# Altium PCB EMG_shield.PcbDoc (part 3 of 3)
Units mm, origin at the board's own origin, x right, y up, seen from the top; angles counter-clockwise.
Board outline 20.05 x 63.8 mm, 6 copper layers (Top Layer, GND/PWR1, SIG1, SIG2, GND/PWR2, Bottom Layer), stack 0.957 mm thick; 130 components, 175 nets, 615 pads, 662 vias.
Unrouted connection lines stored in the file: 5.
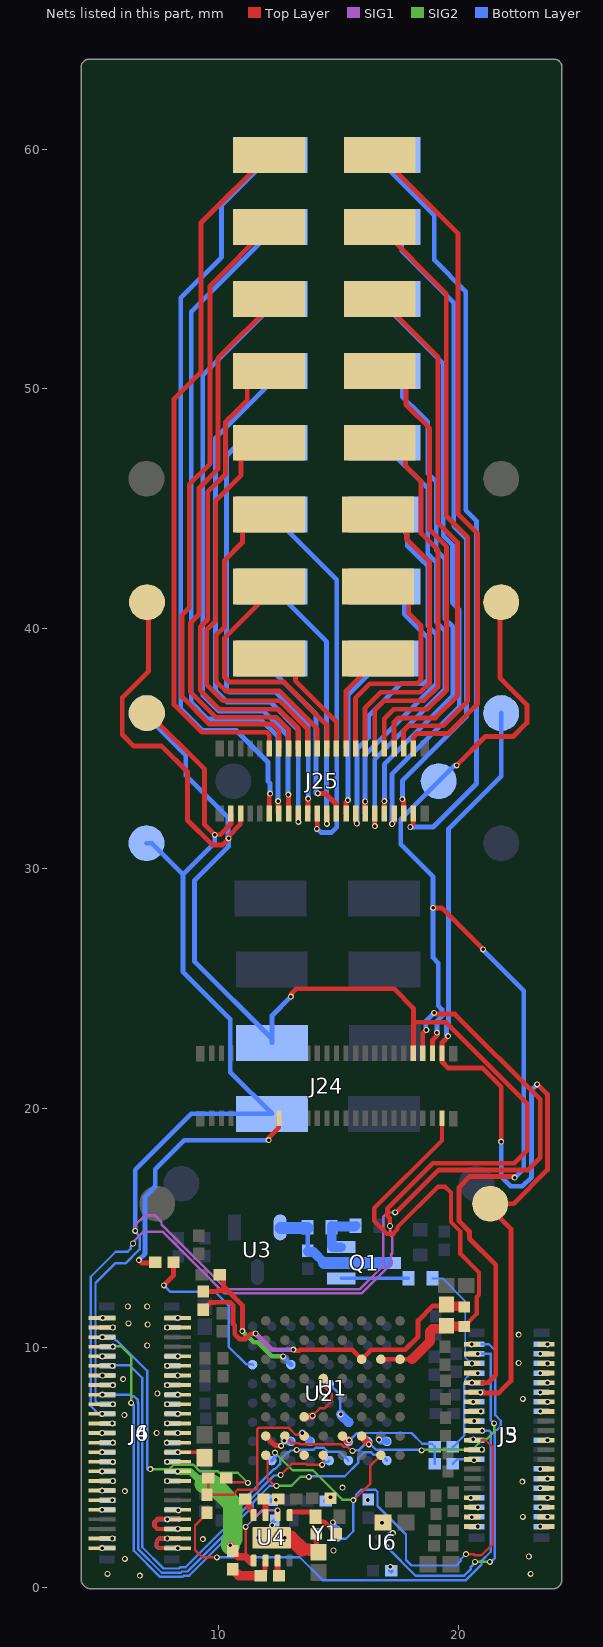
[diagram p7: the nets of this part, all layers, seen from the top]

## Via types
v1: diameter 0.25, hole 0.15, Top Layer to Bottom Layer, tented both sides, 585 vias
v2: diameter 0.25, hole 0.15, SIG2 to Bottom Layer, tented both sides, 41 vias
v3: diameter 0.25, hole 0.15, Top Layer to SIG1, tented both sides, 33 vias
v4: diameter 0.25, hole 0.15, Top Layer to Bottom Layer, 2 vias
v5: diameter 0.25, hole 0.15, Top Layer to GND/PWR1, tented both sides, 1 vias

## Nets (pads, with @x,y where several pads share a name; then routed paths per layer and width w, separated by ;. In a path a pad name is that pad's centre, name@x,y a point inside that pad or via, vN(x,y) a via of type N, cw(c..) or ccw(c..) an arc to the next point about the centre after c; other vN are vias at no path point) (continued)
GND: C1.2 C2.2 C15.2 C16.2 C30.2 C35.2 C36.2 C38.2 C39.2 C40.2 J3.15 J3.21 J3.27 J4.8 J4.18 J4.33 J4.43 J5.15 J5.21 J5.27 J6.8 J6.18 J6.33 J6.43 R3.2 R4.2 U1.C7 U1.D7 U1.E4 U1.F6 U1.H7 U2.C7 U2.D7 U2.E4 U2.F6 U2.H7 U4.2 U4.9 U6.B1 Y1.4 | length 13.3
  Top Layer w0.1: U1.F6@13.55,7.125 U1.F6@13.569,7.144 ; v3(13.9,7.17) 14.205,7.475 14.395,7.475 14.7,7.78 14.7,8.07 14.395,8.375 14.395,8.68 U1.E4@14.35,8.725
  Top Layer w0.2: C38.2@11.747,0.5 11.768,0.5 11.922,0.654 11.922,1.1 U4.2@11.947,1.125 ; U1.H7@11.95,6.325 12.347,5.928 12.581,5.928 v3(12.59,5.919) ; R3.2@14.061,2.25 14.061,1.581 14.061,1.568 C35.2@14.15,1.479 ; v1(16.8,2.7) 16.818,2.7 R4.2@16.843,2.725
  Top Layer w0.3: U1.F6@13.569,7.144 13.874,7.144 v3(13.9,7.17) ; U1.D7@15.15,6.325 15.177,6.325 15.352,6.15 v3(15.425,6.15) ; U1.C7@15.95,6.325 15.95,6.298 16.25,5.998 v3(16.25,5.975)
  Top Layer w0.4: C36.2@10.575,0.775 10.575,0.754 10.829,0.5 C38.2@11.747,0.5
  Top Layer w0.5: 13.475,1.6 13.778,1.6 13.797,1.581 14.061,1.581 14.071,1.581 14.15,1.502 C35.2@14.15,1.479
  Top Layer w0.6: v4(12.747,2.075) 13,2.075 13.475,1.6
  Bottom Layer w0.1: U2.E4@14.6,8.5 15.05,8.05 15.05,7.25 v2(15.075,7.225)
  Bottom Layer w0.2: C15.2@12.213,3.64 12.248,3.675 v1(12.375,3.675) ; v1(12.215,2.599) 12.215,2.613 12.225,2.623 12.225,2.7 C30.2@12.325,2.8 ; C16.2@14.446,3.615 14.467,3.615 14.617,3.765 14.64,3.765 v1(14.65,3.775) ; v2(14.75,2.725) 14.76,2.715 14.76,2.654 14.95,2.464 Y1.4@14.95,2.45 ; v1(16.197,3.658) 16.205,3.658 C40.2@16.225,3.679 ; U6.B1@17,2.1 17.007,2.1 17.172,2.265 17.239,2.265 v1(17.248,2.275) ; v1(17.145,0.87) 17.155,0.86 17.155,0.724 C39.2@17.179,0.7
  Bottom Layer w0.3: v2(12.725,6.125) 12.731,6.119 12.981,6.119 U2.C7@13,6.1 ; v2(13.475,6.45) 13.8,6.125 U2.D7@13.8,6.1 ; v2(16.675,6.175) 16.731,6.119 16.981,6.119 U2.H7@17,6.1
  Bottom Layer w0.4: v2(15.075,7.225) U2.F6@15.4,6.9
  other v1: 6.7,0.5 5.35,0.575 23,0.575 6.075,1.2 22.925,1.3 14.775,1.55 9.325,2.025 22.675,2.95 6.075,4.025 15.15,4.175 22.65,4.425 5.575,4.45 7.85,4.45 23.4,4.95 23.7,6.15 7.4,6.45 6.05,7.2 23.4,7.35 22.675,7.875 7.425,8.1 5.575,8.45 7.85,8.45 6,8.7 22.499,9.368 7,10.1 22.499,10.55 7.025,10.975 6.225,11.025 6.2,11.725 7,11.725
  other v4: 11.647,2.075
I2C_A_SCL: I2C_A_SCL.39 J4.36 J6.36 J24.22 J25.38 TP_I2C_A_SCL.45 TP_I2C_A_SCL_1.45 | length 80
  Top Layer w0.2: TP_I2C_A_SCL_1.45@7,41.1 7.061,41.039 7.061,38.217 5.969,37.125 5.969,35.583 6.452,35.1 7.612,35.1 8.687,34.025 8.687,32.013 9.725,30.975 10.15,30.975 10.4,31.225 v1(10.4,31.25) 10.4,31.347 10.885,31.832 10.885,32.275 J25.38@10.9,32.29 ; v1(13,24.65) 13.022,24.672 13.022,24.775 13.222,24.975 17.302,24.975 18.11,24.167 18.11,23.55 ; v3(17.131,15.084) 17.122,15.094 17.122,15.416 17.022,15.516 17.022,15.803 18.919,17.7 22.321,17.7 22.86,18.239 22.86,20.19 19.465,23.585 18.145,23.585 18.11,23.55 ; J24.22@18.1,22.29 18.1,22.633 18.11,22.643 18.11,23.55
  SIG1 w0.1: v1(6.415,14.355) 6.415,14.407 6.858,14.85 7.65,14.85 10.225,12.275 15.947,12.275 17.189,13.516 17.189,13.9 17.226,13.937 17.226,14.632 17.15,14.708 v3@17.15,15.15
  Bottom Layer w0.1: v1(5.125,7.25) 4.974,7.25 4.65,7.574 4.65,12.97 5.693,14.013 6.191,14.013 6.315,14.137 6.315,14.215 6.415,14.315 v1(6.415,14.355)
  Bottom Layer w0.2: TP_I2C_A_SCL.45@6.979,36.475 6.979,36.346 8.611,34.715 8.611,33.878 10.381,32.108 10.381,31.269 v1(10.4,31.25) 10.4,30.915 8.976,29.491 8.976,26.121 I2C_A_SCL.39@12.213,22.883 ; I2C_A_SCL.39@12.213,22.725 I2C_A_SCL.39@12.213,22.883 ; v1(13,24.65) 12.213,23.863 I2C_A_SCL.39@12.213,22.883
I2C_A_SDA: I2C_A_SDA.40 J4.35 J6.35 J24.23 J25.40 TP_I2C_A_SDA.46 TP_I2C_A_SDA_1.46 | length 73.7
  Top Layer w0.2: TP_I2C_A_SDA_1.46@7,36.475 7.05,36.475 9.4,34.125 9.4,31.823 v1(9.823,31.4) 10.045,31.4 10.5,31.855 J25.40@10.5,32.29 ; v3(17.347,15.65) 17.399,15.65 19.173,17.425 22.89,17.425 23.4,17.935 23.4,20.365 19.84,23.925 19.024,23.925 v1(18.974,23.975) ; J24.23@18.5,22.29 18.5,23.115 v1(18.645,23.26)
  SIG1 w0.1: v1(6.5,14.88) 6.5,15.116 6.909,15.525 7.329,15.525 7.6,15.254 7.6,15.15 10.3,12.45 15.875,12.45 16.85,13.425 16.85,15.476 17.022,15.648 17.346,15.648 v3(17.347,15.65)
  Bottom Layer w0.1: J6.35@5.32,7.675 4.959,7.675 4.85,7.784 4.85,12.714 5.662,13.526 6.099,13.526 6.69,14.116 6.69,14.671 6.5,14.861 v1(6.5,14.88)
  Bottom Layer w0.2: v1(6.5,14.88) 6.505,14.886 6.505,17.43 8.838,19.763 I2C_A_SDA.40@12.213,19.763 10.492,21.484 10.466,21.484 10.466,23.716 8.498,25.684 8.498,29.756 7.204,31.05 TP_I2C_A_SDA.46@6.979,31.05 ; 8.498,29.737 9.823,31.062 v1(9.823,31.4) ; v1(18.645,23.26) 18.645,23.275 18.62,23.275 18.62,23.558 18.588,23.59 v1(18.974,23.975)
  other v1: 5.575,7.65
I2C_B_SCL: J4.30 J6.30
  other v1: 5.14,9.65
I2C_B_SDA: J4.32 J6.32
  other v1: 5.14,8.85
MIC_CLK: J3.36 J5.36
  other v1: 20.8,3.35
MIC_DATA: J3.34 J5.34
  other v1: 20.5,3.75
MIC_THSEL: J3.38 J5.38
  other v1: 20.542,2.944
MIC_WAKE: J3.40 J5.40
  other v1: 20.8,2.55
MSP_CS: J4.12 J6.12
  other v1: 7.825,6.05
MSP_DR1: J4.13 J6.13
  other v1: 8.275,6.45
MSP_DR2: J4.21 J6.21
  other v1: 8.275,9.65
MSP_T\R\S\T\: J4.50 J6.50
  other v1: 5.125,1.65
MSP_TCK: J4.49 J6.49
  other v1: 5.55,2.05
MSP_TDI: J4.39 J6.39
  other v1: 5.575,6.05
MSP_TDO: J4.38 J6.38
  other v1: 5.125,6.45
MSP_TMS: J4.40 J6.40
  other v1: 5.125,5.65
MSP_VCC: J4.37 J6.37
  other v1: 5.55,6.85
NetC37_1: C37.1 U4.8 | length 0.8
  Top Layer w0.25: C37.1@11.097,3.7 11.118,3.7 11.229,3.589 11.229,3.367 11.447,3.15 U4.8@11.447,3.025
NetC37_2: C37.2 U4.7 | length 0.7
  Top Layer w0.25: C37.2@11.854,3.7 11.947,3.607 U4.7@11.947,3.025
NetC38_1: C38.1 U4.3 | length 0.6
  Top Layer w0.25: U4.3@12.447,1.125 12.447,0.557 C38.1@12.504,0.5
NetJ3_1: J3.1 J5.1
  other v1: 23.7,10.15
NetJ3_3: J3.3 J5.3
  other v1: 23.4,9.75
NetJ3_5: J3.5 J5.5
  other v1: 23.7,9.35
NetJ3_7: J3.7 J5.7
  other v1: 23.4,8.95
NetJ3_9: J3.9 J5.9
  other v1: 23.7,8.55
NetJ3_11: J3.11 J5.11
  other v1: 23.4,8.15
NetJ3_13: J3.13 J5.13
  other v1: 23.7,7.75
NetJ3_16: J3.16 J5.16 | length 0.5
  Top Layer w0.15: J3.16@20.56,7.35 v1(20.925,7.35)
  Bottom Layer w0.15: J5.16@20.745,7.35 v1(20.925,7.35)
NetJ3_18: J3.18 J5.18
  other v1: 20.65,6.95
NetJ3_29: J3.29 J5.29
  other v1: 23.7,4.55
NetJ3_31: J3.31 J5.31
  other v1: 23.4,4.15
NetJ3_33: J3.33 J5.33
  other v1: 23.7,3.75
NetJ3_35: J3.35 J5.35
  other v1: 23.4,3.35
NetJ3_37: J3.37 J5.37
  other v1: 23.7,2.95
NetJ3_39: J3.39 J5.39
  other v1: 23.4,2.55
NetJ24_43: J24.43 R10.1 | length 11.3
  Top Layer w0.2: v1(6.655,13.662) 6.781,13.536 7.235,13.536 7.235,13.633 7.343,13.633 R10.1@7.343,13.566 ; v1(12.072,18.661) 12.072,18.772 12.49,19.19 J24.43@12.49,19.6
  Bottom Layer w0.2: v1(6.655,13.662) 6.655,13.675 6.915,13.935 6.915,16.306 7.341,16.731 7.341,17.45 8.551,18.661 v1(12.072,18.661)
NetJ25_1: J25.1 J_A1P.1 | length 28.3
  Top Layer w0.2: J_A1P.1@16.705,59.75 19.964,56.49 19.964,44.783 20.78,43.968 20.78,36.853 19.553,35.625 18.252,35.625 18.1,35.473 J25.1@18.1,35
NetJ25_2: J25.2 J_B1P.21 | length 31.9
  Top Layer w0.2: v1(17.983,31.725) 18.1,31.842 J25.2@18.1,32.29
  Bottom Layer w0.2: J_B1P.21@16.9,59.75 16.9,59.32 18.974,57.246 18.974,55.377 20.295,54.056 20.295,44.933 20.745,44.483 20.745,33.54 18.93,31.725 v1(17.983,31.725)
NetJ25_3: J25.3 J_A1N.2 | length 25.2
  Top Layer w0.2: J_A1N.2@16.705,56.75 19.482,53.973 19.482,44.695 20.377,43.8 20.377,36.967 19.36,35.95 17.9,35.95 17.7,35.75 J25.3@17.7,35
NetJ25_4: J25.4 J_B1N.22 | length 27.3
  Top Layer w0.2: v1(17.65,32.884) 17.7,32.834 J25.4@17.7,32.29
  Bottom Layer w0.2: J_B1N.22@16.9,56.75 17.328,56.75 17.625,56.453 17.625,55.75 ; 17.627,55.752 19.787,53.593 19.787,44.275 20.32,43.742 20.32,36.325 17.65,33.655 v1(17.65,32.884)
NetJ25_5: J25.5 J_A2P.3 | length 22.1
  Top Layer w0.2: J_A2P.3@16.705,53.75 19.138,51.316 19.138,44.4 19.95,43.588 19.95,37.201 19.025,36.275 17.475,36.275 17.3,36.1 J25.5@17.3,35
NetJ25_6: J25.6 J_B2P.23 | length 25.5
  Top Layer w0.2: v1(17.221,31.85) 17.3,31.929 J25.6@17.3,32.29
  Bottom Layer w0.2: J_B2P.23@16.35,53.375 16.725,53.75 J_B2P.23@16.9,53.75 16.9,53.501 19.355,51.047 19.355,43.875 19.736,43.494 19.736,41.075 20.02,40.791 20.02,36.745 17.221,33.946 17.221,32.938 17.225,32.935 17.225,32.665 17.221,32.662 v1(17.221,31.85)
NetJ25_7: J25.7 J_A2N.4 | length 19.1
  Top Layer w0.2: J_A2N.4@16.705,50.75 17.1,50.75 17.8,50.05 17.8,49.334 18.784,48.35 18.784,44.117 19.492,43.409 19.492,37.434 18.692,36.634 17.282,36.634 16.891,36.243 J25.7@16.891,34.96
NetJ25_8: J25.8 J_B2N.24 | length 21
  Top Layer w0.1: v1@16.891,32.746 16.888,32.75 16.888,32.788 v1(16.9,32.8)
  Top Layer w0.2: J25.8@16.891,32.25 v1@16.891,32.746
  Bottom Layer w0.2: v1(16.9,32.8) 16.9,34.345 19.745,37.189 19.745,40.087 19.412,40.42 19.412,42.919 19.058,43.273 19.058,46.118 18.704,46.472 18.704,48.626 18.034,49.296 18.02,49.296 17.65,49.666 17.65,50.225 17.125,50.75 J_B2N.24@16.9,50.75
NetJ25_9: J25.9 J_A3P.5 | length 16
  Top Layer w0.2: J25.9@16.5,35 16.5,36.6 16.888,36.988 17.667,36.988 18.546,36.988 19.138,37.581 19.138,38.459 19.138,38.64 19.138,43.262 18.43,43.97 18.43,46.14 17.775,46.795 17.775,47.05 17.075,47.75 J_A3P.5@16.705,47.75
NetJ25_10: J25.10 J_B3P.25 | length 18.7
  Top Layer w0.2: v1(16.5,31.762) J25.10@16.5,32.209
  Bottom Layer w0.2: v1(16.5,31.762) 16.5,34.55 19.412,37.462 19.412,39.919 19.058,40.273 19.058,42.773 18.704,43.127 18.704,45.846 16.9,47.65 J_B3P.25@16.9,47.75
NetJ25_11: J25.11 J_A3N.6 | length 13.1
  Top Layer w0.2: J25.11@16.091,34.96 16.091,36.692 16.741,37.342 17.52,37.342 18.399,37.342 18.784,37.727 18.784,38.606 18.784,38.786 18.784,42.774 17.816,43.742 17.816,44.05 17.116,44.75 J_A3N.6@16.626,44.75
NetJ25_12: J25.12 J_B3N.26 | length 14.7
  Top Layer w0.1: v1@16.092,32.725 v1(16.092,32.788)
  Top Layer w0.2: J25.12@16.091,32.25 v1@16.091,32.725
  Bottom Layer w0.2: v1(16.092,32.788) 16.092,34.734 19.058,37.701 19.058,39.773 18.704,40.127 18.704,42.596 18.704,42.626 18.526,42.804 18.496,42.804 17.85,43.45 17.85,43.925 17.025,44.75 J_B3N.26@16.9,44.75
NetJ25_13: J25.13 J_A4P.7 | length 10.2
  Top Layer w0.2: J25.13@15.691,34.96 15.691,37.096 16.291,37.696 17.374,37.696 18.252,37.696 18.43,37.874 18.43,38.753 18.43,38.933 18.43,39.007 18.43,40.12 17.916,40.634 17.916,41.05 17.366,41.6 16.776,41.6 J_A4P.7@16.626,41.75
NetJ25_14: J25.14 J_B4P.27 | length 13.2
  Top Layer w0.2: J25.14@15.691,32.25 15.715,32.226 15.715,31.918 15.75,31.883 v1(15.75,31.869)
  Bottom Layer w0.2: v1(15.75,31.869) 15.75,34.976 16.23,35.456 16.23,36.346 17.58,37.696 18.526,37.696 18.704,37.874 18.704,39.626 17.727,40.603 17.727,41.673 17.65,41.75 J_B4P.27@16.9,41.75
NetJ25_15: J25.15 J_A4N.8 | length 4.3
  Top Layer w0.2: J25.15@15.3,35 15.3,37.4 16.626,38.726 J_A4N.8@16.626,38.75
NetJ25_16: J25.16 J_B4N.28 | length 7.2
  Top Layer w0.2: J25.16@15.291,32.25 15.291,32.765 v1(15.375,32.849)
  Bottom Layer w0.2: v1(15.375,32.849) 15.375,37.225 J_B4N.28@16.9,38.75
NetJ25_17: J25.17 J_A5P.9 | length 5.3
  Top Layer w0.2: J_A5P.9@12.08,38.75 12.7,38.75 13.185,38.265 13.185,37.825 14.891,36.119 J25.17@14.891,34.96
NetJ25_18: J25.18 J_B5P.29 | length 7.8
  Top Layer w0.2: v1(14.122,33.125) 14.439,33.125 14.9,32.664 J25.18@14.9,32.29
  Bottom Layer w0.2: J_B5P.29@12.2,38.75 12.2,38.264 14.046,36.418 14.046,33.125 v1(14.122,33.125)
NetJ25_19: J25.19 J_A5N.10 | length 10.6
  Top Layer w0.2: J_A5N.10@12.08,41.75 12.08,41.455 10.235,39.61 10.235,37.965 10.425,37.775 12.702,37.775 14.5,35.977 J25.19@14.5,35
NetJ25_20: J25.20 J_B5N.30 | length 11.2
  Top Layer w0.2: v1@14.499,31.859 14.499,32.228 J25.20@14.506,32.235
  Bottom Layer w0.2: J_B5N.30@12.2,41.75 14.478,39.472 14.478,31.878 v1(14.498,31.858)
NetJ25_21: J25.21 J_A6P.11 | length 14
  Top Layer w0.2: J_A6P.11@12.08,44.75 11.675,44.75 10.975,44.05 10.975,43.59 10.235,42.85 10.235,40.086 9.886,39.736 9.886,37.788 10.274,37.4 12.512,37.4 14.091,35.821 J25.21@14.091,34.96
NetJ25_22: J25.22 J_B6P.31 | length 15.8
  Top Layer w0.2: v1(14.077,31.65) 14.1,31.673 J25.22@14.1,32.29
  Bottom Layer w0.2: J_B6P.31@12.2,44.75 14.91,42.04 14.91,31.71 14.7,31.5 14.24,31.5 14.09,31.65 v1(14.077,31.65)
NetJ25_23: J25.23 J_A6N.12 | length 17.7
  Top Layer w0.2: J_A6N.12@12.08,47.75 10.922,47.75 10.922,46.397 9.864,45.339 9.864,40.327 9.489,39.952 9.489,37.66 10.161,36.988 10.531,36.988 12.536,36.988 13.691,35.832 J25.23@13.691,34.96
NetJ25_24: J25.24 J_B6N.32 | length 19.6
  Top Layer w0.2: J25.24@13.715,32.274 13.712,32.277 13.712,32.902 v1(13.721,32.911)
  Bottom Layer w0.2: J_B6N.32@12.2,47.75 10.85,47.75 10.312,47.212 10.312,37.457 10.427,37.342 12.377,37.342 13.721,35.998 v1(13.721,32.911)
NetJ25_25: J25.25 J_A7P.13 | length 20.3
  Top Layer w0.2: J_A7P.13@12.08,50.75 11.876,50.75 11.176,50.05 11.176,49.516 10.464,48.804 10.454,48.804 10.276,48.626 10.276,46.447 9.527,45.698 9.527,40.379 9.214,40.066 9.214,37.434 10.012,36.636 12.499,36.636 13.3,35.835 13.3,34.969 J25.25@13.291,34.96
NetJ25_26: J25.26 J_B7P.33 | length 22.6
  Top Layer w0.2: J25.26@13.3,32.29 13.305,32.285 13.305,31.942 v1(13.31,31.937)
  Bottom Layer w0.2: J_B7P.33@12.2,50.75 12.2,50.288 9.85,47.938 9.85,37.419 10.328,36.941 12.134,36.941 13.31,35.765 v1(13.31,31.937)
NetJ25_27: J25.27 J_A7N.14 | length 23.4
  Top Layer w0.2: J_A7N.14@12.08,53.75 12.256,53.574 9.957,51.274 9.957,46.65 9.169,45.863 9.169,40.608 8.814,40.253 8.814,37.35 9.864,36.3 12.39,36.3 12.9,35.79 J25.27@12.9,35
NetJ25_28: J25.28 J_B7N.34 | length 25.2
  Top Layer w0.2: v1(12.891,33.075) 12.9,33.066 J25.28@12.9,32.29
  Bottom Layer w0.2: J_B7N.34@12.2,53.75 12.2,53.448 9.322,50.57 9.322,37.215 9.987,36.55 11.866,36.55 12.878,35.538 v1@12.878,33.089
NetJ25_29: J25.29 J_A8P.15 | length 26.5
  Top Layer w0.2: J_A8P.15@12.08,56.75 9.627,54.297 9.627,46.875 8.763,46.011 8.763,40.874 8.458,40.569 8.458,37.15 9.583,36.025 12.226,36.025 12.5,35.751 J25.29@12.5,35
NetJ25_30: J25.30 J_B8P.35 | length 28.7
  Top Layer w0.2: v1(12.465,32.8) 12.465,32.325 J25.30@12.5,32.29
  Bottom Layer w0.2: J_B8P.35@12.2,56.75 12.2,56.573 8.839,53.213 8.839,36.925 9.539,36.225 11.727,36.225 12.465,35.487 v1(12.465,32.8)
NetJ25_31: J25.31 J_A8N.16 | length 29.6
  Top Layer w0.2: J_A8N.16@12.075,59.745 J_A8N.16@12.08,59.75 9.246,56.916 9.246,50.7 8.128,49.582 8.128,36.824 9.277,35.675 11.983,35.675 12.1,35.558 J25.31@12.1,35
NetJ25_32: J25.32 J_B8N.36 | length 31.4
  Top Layer w0.2: J25.32@12.1,32.29 12.1,33.071 12.131,33.102 v1(12.131,33.115)
  Bottom Layer w0.2: v1(12.131,33.115) 12.131,33.549 12.04,33.64 12.04,34.435 10.725,35.75 9.304,35.75 8.407,36.647 8.407,53.793 10.109,55.495 10.109,57.659 J_B8N.36@12.2,59.75
NetQ1_1: Q1.1 R5.2 | length 2.8
  Bottom Layer w0.15: Q1.1@15.1,12.9 R5.2@17.9,12.9
NetQ1_2: Q1.2 R6.1 R7.2 | length 2.3
  Bottom Layer w0.4: Q1.2@15.1,14.2 14.75,14.2 14.7,14.25 14.7,15.1 14.737,15.062 15.663,15.062 R6.1@15.7,15.1
NetR2_1: R2.1 R3.1 U4.5 | length 2.5
  Top Layer w0.2: U4.5@12.947,3.025 12.947,3.137 12.972,3.162 13.754,3.162 13.767,3.15 13.872,3.15 14.022,3 14.022,2.9 14.172,2.75 14.382,2.75 14.882,2.25 R3.1@14.889,2.25
NetR10_2: R10.2 U2.A3 | length 7.2
  Top Layer w0.2: v1(7.701,12.607) 8.101,13.008 R10.2@8.101,13.566
  Bottom Layer w0.1: v1(7.701,12.607) 7.959,12.35 9.825,12.35 10.4,11.775 10.4,10.05 11.128,9.322 11.378,9.322 U2.A3@11.4,9.3
NetR11_2: R11.2 R35.1 U1.F7 | length 7.5
  Top Layer w0.1: R35.1@9.5,3.879 9.546,3.925 R11.2@9.546,4.575 ; R35.1@9.546,3.879 10.63,3.879 10.689,3.937 10.689,3.998 10.777,4.086 11.541,4.086 11.6,4.145 11.6,6.616 11.659,6.675 12.895,6.675 13.2,6.37 13.505,6.37 U1.F7@13.55,6.325
NetR12_2: R12.2 R36.1 U2.F7 | length 4.7
  Bottom Layer w0.1: U2.F7@15.4,6.1 15.75,6.45 18.025,6.45 18.475,6 18.871,6 R12.2@18.996,5.875 R36.1@18.996,5.175
not_used: J3.24 J5.24 | length 0.6
  Top Layer w0.1: J3.24@20.56,5.75 20.566,5.756 20.957,5.756 v1(20.963,5.762)
  Bottom Layer w0.1: J5.24@20.745,5.75 20.757,5.762 v1(20.963,5.762)
nRF_P0.04: J3.20 J5.20 R35.2 | length 21.2
  Top Layer w0.1: R35.2@9.5,3.121 9.5,3.1 9,2.6 9,1.575 9.309,1.266 v1(9.909,1.266) ; J3.20@20.56,6.55 v1(20.975,6.55)
  Bottom Layer w0.1: v1(9.909,1.266) 13.368,1.266 14.32,0.314 20.303,0.314 20.95,0.961 20.95,1.114 21.333,1.497 21.333,6.491 21.274,6.55 v1(20.975,6.55) J5.20@20.745,6.55
nRF_P0.05: J3.22 J5.22 U1.B8 U2.B8 Y1.1 | length 22.7
  Top Layer w0.1: v1@15.6,3.625 16.3,4.325 16.3,5.075 U1.B8@16.75,5.525 ; v1(20.3,1.4) 20.62,1.4 20.67,1.35 20.95,1.35 21.425,1.825 21.425,5.85 21.125,6.15 20.642,6.15 v1(20.608,6.184)
  SIG2 w0.1: v2(12.336,5.629) 13.065,4.9 13.914,4.9 15.139,3.675 15.575,3.675 v1(15.6,3.65)
  Bottom Layer w0.1: Y1.1@14.95,2.04 15.29,2.04 15.6,2.35 15.6,3.684 15.725,3.809 15.725,3.885 15.927,4.086 16.523,4.086 16.611,3.998 16.611,3.402 17.8,2.213 17.8,1.147 18.022,0.925 19.9,0.925 20.086,1.111 20.086,1.186 v1(20.3,1.4)
  Bottom Layer w0.15: U2.B8@12.2,5.3 12.336,5.436 v2(12.336,5.629)
nRF_P0.07/AMUX: J3.26 J5.26 R36.2 | length 1.1
  Bottom Layer w0.1: R36.2@19.754,5.175 19.929,5.35 J5.26@20.745,5.35
  other v1: 20.635,5.318
nRF_P0.12_GAP_GPIO64: J3.12 J5.12 J24.25 TP_GPIO64.48 TP_GPIO64_1.48 | length 43.7
  Top Layer w0.2: v1(19.555,23) 19.555,22.991 19.3,22.736 J24.25@19.3,22.29 19.3,21.932 19.561,21.671 20.991,21.671 21.082,21.579 21.082,21.576 21.768,20.89 v1(21.768,18.606) ; J3.12@20.56,8.15 v1(20.9,8.15) 20.925,8.125 21.675,8.125 22.174,8.624 22.174,14.967 TP_GPIO64_1.48@21.54,15.601 ; TP_GPIO64_1.48@21.311,16.013 22.287,16.013 23.698,17.424 23.698,20.575 23.323,20.95 23.308,20.95 v1(23.266,20.991)
  Bottom Layer w0.2: v1(19.555,23) 19.525,23 19.484,23.041 19.484,23.449 19.566,23.531 19.566,23.719 19.574,23.726 19.574,24.224 19.566,24.231 19.566,31.636 21.768,33.837 TP_GPIO64.48@21.768,36.475 ; v1(21.768,18.606) 21.768,17.13 22.159,16.738 22.651,16.738 23.038,17.125 23.038,20.763 v1(23.266,20.991)
nRF_P0.31: J3.2 J5.2 U6.B2 | length 15.2
  SIG2 w0.1: v2(20.675,1.075) v2(21.3,1.075)
  Bottom Layer w0.1: U6.B2@17,1.7 18.2,0.5 20.225,0.5 20.508,0.783 20.508,0.867 20.675,1.034 v2(20.675,1.075) ; J5.2@20.745,10.15 21.259,10.15 21.525,9.884 21.525,7.189 21.75,6.964 21.75,6.736 21.589,6.575 21.508,6.575 21.508,1.242 21.341,1.075 v2(21.3,1.075)
  other v1: 20.54,10.15
nRF_P1.00_GAP_GPIO60: J3.4 J5.4 U1.G7 U2.G7 | length 13.5
  Top Layer w0.1: U1.G7@12.75,6.325 13.049,6.026 13.354,6.026 13.405,5.975 14.55,5.975 15.111,5.975 15.218,5.868 15.367,5.868 15.526,5.709 v1(15.567,5.709)
  SIG2 w0.1: v2(18.45,5.725) 18.475,5.75 20.562,5.75 21.012,6.2 21.175,6.2 21.475,6.5 v2(21.475,6.85)
  Bottom Layer w0.1: v1(15.567,5.709) 15.596,5.738 15.838,5.738 U2.G7@16.2,6.1 16.55,5.75 18.425,5.75 v2(18.45,5.725) ; v1(20.8,9.75) 21.341,9.75 21.341,6.984 v2(21.475,6.85)
nRF_P1.01_GAP_GPIO61: J3.6 J5.6 R5.1 | length 4.5
  Bottom Layer w0.075: R5.1@18.9,12.9 19.325,12.9 20.274,11.951 20.274,9.582 20.396,9.46 20.42,9.46 20.53,9.35 v1(20.551,9.35)
nRF_P1.09_GAP_GPIO62: J3.8 J5.8 R12.1 | length 3.7
  Bottom Layer w0.075: 20.225,8.521 20.277,8.574 20.277,8.722 20.358,8.803 20.382,8.803 20.53,8.95 v1(20.785,8.95)
  Bottom Layer w0.1: R12.1@19.754,5.875 19.775,5.875 19.961,6.061 19.961,6.083 20.232,6.353 20.232,8.338 20.225,8.345 20.225,8.521
nRF_P1.11_GAP_GPIO63: J3.10 J5.10 J24.24 TP_GPIO63.47 TP_GPIO63_1.47 | length 48.5
  Top Layer w0.2: J24.24@18.9,22.29 18.91,22.3 18.91,22.849 19.121,23.06 19.121,23.115 v1(19.086,23.15) ; v1(18.93,28.35) 19.293,28.35 v1(21.018,26.625) ; v1(19.914,34.3) 21.114,35.5 22.276,35.5 22.841,36.066 22.841,36.821 21.717,37.946 TP_GPIO63_1.47@21.717,41.225 ; v1(20.55,8.55) J3.10@20.56,8.55 21.219,8.55 21.539,8.87 21.539,13.469 20.447,14.562 20.447,14.852 20.011,15.288 20.011,16.695 20.466,17.15 22.277,17.15 v1(22.327,17.1)
  Bottom Layer w0.2: v1(19.086,23.15) 19.086,23.628 19.299,23.84 19.299,24.11 19.148,24.261 19.148,26.052 18.931,26.269 18.931,29.646 17.577,31 17.577,32.051 TP_GPIO63.47@19.164,33.638 19.826,34.3 v1(19.914,34.3) ; v1(21.018,26.625) 21.018,26.588 22.708,24.899 22.708,17.481 v1(22.327,17.1)
nRF_QSPI_CLK: J4.20 J6.20
  other v1: 7.85,9.25
nRF_QSPI_CS_CONN: J4.14 J6.14
  other v1: 7.85,6.85
nRF_QSPI_IO0: J4.19 J6.19
  other v1: 8.275,8.85
nRF_QSPI_IO1: J4.17 J6.17
  other v1: 8.275,8.05
nRF_QSPI_IO2: J4.16 J6.16
  other v1: 7.85,7.65
nRF_QSPI_IO3: J4.15 J6.15
  other v1: 8.275,7.25
R\S\T\: J4.5 J6.5
  other v1: 8.305,3.222
REF_2.0V: C33.1 Q1.3 R7.1 U3.2 | length 5.7
  Bottom Layer w0.2: C33.1@13.7,14.057 R7.1@13.7,15.1
  Bottom Layer w0.4: C33.1@13.7,14.036 13.736,13.999 13.94,13.999 14.389,13.55
  Bottom Layer w0.5: U3.2@12.568,15 R7.1@13.7,15 ; 14.389,13.55 Q1.3@17,13.55
RLDINV: C21.1 R1.1 R33.2 U1.C3 | length 14.3
  Top Layer w0.2: R33.2@9.35,11.593 9.35,11.614 9.628,11.892 9.81,11.892 9.823,11.905 10.461,11.905 10.578,11.788 10.578,11.016 10.653,10.941 10.653,10.565 10.843,10.375 11.113,10.375 11.328,10.59 11.515,10.59 v3(11.525,10.6) ; v3(13.1,9.925) 13.114,9.925 13.155,9.883 13.343,9.883 13.384,9.925 15.55,9.925 U1.C3@15.95,9.525 16.35,9.925 17.758,9.925 18.303,10.47 18.303,11.139 18.914,11.75 19.437,11.75 C21.1@19.492,11.805
  Top Layer w0.4: C21.1@19.492,11.805 19.561,11.736 20.192,11.736 R1.1@20.225,11.704
  SIG1 w0.2: v3(11.525,10.6) 12.2,9.925 v3(13.1,9.925)
RLDINV_ADS: R33.1 R34.2 U2.C3 | length 6.4
  Top Layer w0.2: R33.1@9.35,12.35 9.901,12.35 9.946,12.395 10.36,12.395 ; R34.2@10.032,13.05 10.054,13.05 10.19,12.914 10.19,12.565 10.36,12.395 ; v1(10.978,10.7) 10.978,11.777 10.36,12.395
  SIG2 w0.2: v1(10.978,10.7) 11.442,10.236 11.614,10.236 12.2,9.65 v2(12.675,9.65)
  Bottom Layer w0.2: v2(12.675,9.65) 12.675,9.638 13,9.313 U2.C3@13,9.3
RLDOUT: C21.2 J24.26 R1.2 U1.A3 U1.B3 | length 20.6
  Top Layer w0.18: J24.26@19.3,19.686 19.3,18.654 16.476,15.83 16.476,15.294 17.006,14.764 17.282,14.764 17.282,14.789 17.446,14.954 17.446,15.039 19.133,16.725 19.432,16.725 19.675,16.482 19.675,15.249 20.066,14.858 20.066,13.925 20.846,13.145 20.846,12.215 20.745,12.115 20.745,11.413 20.229,10.896 R1.2@20.225,10.896
  Top Layer w0.2: U1.B3@16.75,9.525 U1.A3@17.55,9.525 18.05,9.525
  Top Layer w0.4: 18.05,9.525 18.8,10.275 18.8,10.691 18.904,10.795 19.382,10.795 19.492,10.905 C21.2@19.492,10.925 19.506,10.911 20.211,10.911 R1.2@20.225,10.896
SPI_A_CLK: J4.31 J6.31 U1.F8 U2.F8 | length 20.7
  Top Layer w0.1: v1(13.242,5.751) 13.283,5.751 13.508,5.525 U1.F8@13.55,5.525
  Bottom Layer w0.1: v1(5.55,9.25) 5.575,9.275 6.273,9.275 6.8,8.748 6.8,1.688 7.688,0.8 8.33,0.8 8.38,0.85 8.61,0.85 10.152,2.392 10.398,2.392 10.486,2.48 10.486,2.956 11.05,3.52 11.05,3.7 12.3,4.95 12.345,4.95 12.55,5.155 12.55,5.345 12.855,5.65 12.917,5.65 12.989,5.722 13.213,5.722 v1(13.242,5.751) 13.945,5.75 14.028,5.833 14.372,5.833 14.53,5.675 15.025,5.675 U2.F8@15.4,5.3
SPI_A_CS: J4.28 J6.28 R11.1 | length 11.9
  Top Layer w0.1: R11.1@10.304,4.575 10.49,4.389 11.187,4.389 v1(11.201,4.375)
  SIG2 w0.1: v2(7.135,4.947) 7.936,4.947 8.114,5.125 8.931,5.125 9.206,4.85 9.942,4.85 10.001,4.792 10.784,4.792 v1(11.201,4.375)
  Bottom Layer w0.1: J6.28@5.345,10.45 5.565,10.45 5.705,10.31 5.737,10.31 7,9.047 7,4.95 7.025,4.925 7.047,4.947 v2(7.135,4.947)
  other v1: 5.14,10.45
SPI_A_MISO: J4.34 J6.34 U1.E8 U2.E8 | length 18.7
  Top Layer w0.1: v1(12.575,4.7) 13.043,5.168 13.63,5.168 13.673,5.125 v1(14.3,5.125) ; v1@14.293,5.107 14.325,5.14 14.325,5.5 U1.E8@14.35,5.525
  Bottom Layer w0.1: J6.34@5.345,8.05 6.275,8.05 6.339,7.986 6.454,7.986 6.615,7.825 6.615,7.71 6.625,7.7 6.625,1.615 7.615,0.625 8.403,0.625 8.453,0.675 8.682,0.675 10.224,2.217 10.471,2.217 10.661,2.408 10.661,2.884 11.225,3.447 11.225,3.605 12.3,4.68 12.555,4.68 v1(12.575,4.7) ; v1(14.3,5.125) 14.341,5.125 14.412,5.197 14.416,5.197 14.461,5.243 14.543,5.243 U2.E8@14.6,5.3
  other v1: 5.14,8.05
SPI_A_MOSI: J4.29 J6.29 U1.H8 U2.H8 | length 24.4
  Top Layer w0.1: U1.H8@11.95,5.525 12.007,5.468 12.007,5.334 12.025,5.316 12.025,4.55 12.268,4.307 12.302,4.307 12.359,4.25 v1(12.4,4.25)
  SIG2 w0.1: v1(5.575,10.05) 5.6,10.075 5.9,10.075 6.34,9.635 v2(6.34,7.711) ; v1(12.4,4.25) 13.025,4.25 13.4,4.625 v2(13.75,4.625)
  Bottom Layer w0.1: v2(6.34,7.711) 6.45,7.602 6.45,1.543 7.543,0.45 8.475,0.45 8.525,0.5 8.755,0.5 10.297,2.042 10.543,2.042 10.836,2.335 10.836,2.811 11.4,3.375 11.4,3.533 12.117,4.25 v1(12.4,4.25) ; v2(13.75,4.625) 13.775,4.65 15.245,4.65 15.8,5.205 15.8,5.395 16.055,5.65 16.345,5.65 16.445,5.55 16.75,5.55 U2.H8@17,5.3
SPI_B_CLK: J4.27 J6.27 | length 0.7
  Top Layer w0.15: J4.27@5.125,10.85 v1(5.575,10.85)
  Bottom Layer w0.15: J6.27@5.345,10.85 v1(5.575,10.85)
SPI_B_CS: J4.24 J6.24
  other v1: 7.85,10.85
SPI_B_MISO: J4.26 J6.26 | length 0.2
  Top Layer w0.18: J4.26@5.125,11.25 v1(5.15,11.25)
  Bottom Layer w0.18: v1(5.15,11.25) J6.26@5.345,11.25
SPI_B_MOSI: J4.25 J6.25
  other v1: 8.275,11.25
SWDCLK: J4.45 J6.45
  other v1: 5.55,3.65
SWDIO: J4.46 J6.46
  other v1: 5.125,3.25
SWO: J4.44 J6.44
  other v1: 5.125,4.05
VA0: J4.41 J6.41
  other v1: 5.575,5.25
VA1: J4.11 J6.11 R14.2 | length 1.2
  Top Layer w0.15: v1(8.275,5.65) 9.4,5.65 R14.2@9.475,5.575
VBAT: J4.1 J4.2 J6.1 J6.2 | length 3.7
  Top Layer w0.15: v1(8.275,1.65) 7.5,1.65 7.4,1.75 7.4,1.95 7.5,2.05 7.825,2.05 J4.2@8.275,2.05
  Bottom Layer w0.15: J6.1@8.055,1.65 7.475,1.65 7.387,1.738 7.387,1.862 7.4,1.875 7.4,1.962 7.488,2.05 v1(7.85,2.05) J6.2@8.055,2.05
VD0: J4.42 J6.42
  other v1: 5.125,4.85
VD1: C36.1 J4.9 J6.9 U4.1 U4.6 | length 9
  Top Layer w0.1: 11.113,1.288 11.115,1.29 11.115,1.424 v3(11.115,2.54) ; U4.6@12.447,3.025 12.447,3.222 v3(12.45,3.225)
  Top Layer w0.25: U4.1@11.422,1.075 11.447,1.1 U4.1@11.447,1.125
  Top Layer w0.3: v1(10.475,1.767) 10.489,1.754 10.489,1.618 C36.1@10.575,1.532 10.575,1.511 10.798,1.288 11.113,1.288 U4.1@11.325,1.075
  SIG1 w0.1: v3(11.115,2.54) 11.8,3.225 v3(12.45,3.225)
  SIG2 w0.3: v1(8.275,4.85) 8.817,4.85 9.092,4.575 9.125,4.575 9.375,4.325
  SIG2 w0.8: 9.375,4.325 9.725,4.325 10.575,3.475 10.575,2.025 10.475,1.925 v1(10.475,1.767)
VD2: J4.10 J6.10
  other v1: 7.85,5.25
VQPS_FUSE_1V8: J3.14 J5.14
  other v1: 20.6,7.75
Vsys: J4.3 J4.4 J6.3 J6.4 | length 3.9
  Top Layer w0.18: v1(7.85,2.85) J4.4@8.275,2.85 ; J4.4@7.85,2.864 7.635,2.864 7.624,2.875 7.475,2.875 7.325,2.725 7.325,2.555 7.43,2.45 v1(8.275,2.45)
  Bottom Layer w0.18: J6.3@8.055,2.45 7.43,2.45 7.325,2.555 7.325,2.745 7.43,2.85 v1(7.85,2.85) J6.4@8.055,2.85
pads on no net: J5.41 J5.42 J5.43 J5.44 J6.56 J24.44 J24.45 J24.46 J24.47 J24.48 J24.49 J24.50 J24.56 J25.41 J25.42 J25.43 J25.44 U1.E3 U1.E5 U1.E6 U1.E7 U1.F3 U1.F4 U1.F5 U1.G4 U2.E3 U2.E5 U2.E6 U2.E7 U2.F3 U2.F4 U2.F5 U2.G4

## Polygon pours and split planes (outlines as drawn)
AGND on SIG1 "AGND_L03_P022" (solid, remove dead copper, pour order 22): -0.024,-2.497 27.476,-2.497 27.476,63.75 -0.024,63.75
AVSS on SIG1 "AVSS_L03_P026" (solid, remove dead copper, pour order 26): 10.375,8.325 10.45,8.4 10.45,11.45 15.675,11.45 18.225,14 20.1,14 20.925,13.175 20.875,13.125 20.875,12.35 17.75,9.225 17.75,8.4 16.275,8.4 15.65,7.775 15.45,7.975 14.35,7.975
GND on SIG1 "GND_L03_P017" (solid, remove dead copper, pour order 17): 17.25,6.2 17.225,6.225 16.5,6.225 16.5,6.875 16.3,7.075 15.6,7.075 15.25,7.425 12.7,7.425 12.45,7.175 12.45,6.675 11.975,6.675 11.7,6.4 11.7,5.075 11.675,5.075 10.7,4.1 10.7,2.675 10.125,2.1 8.95,2.1 8.95,2.125 8.825,2.25 8.825,12.2 8.375,12.65 3.75,12.65 3.75,-0.075 4.95,-1.275 26.475,-1.275 26.475,10.975 26.35,11.1 20.925,11.1 20.925,10.95 20.15,10.175 20.15,1.725 19.925,1.5 17.75,1.5 17.75,2.05 17.4,2.4 17.4,3.15 16.95,3.15 16.725,3.375 16.725,4.7 17.225,5.2
AGND on Top Layer "AGND_L01_P016" (solid, remove dead copper, pour order 16): 0.14,-2 27.64,-2 27.64,65.553 0.14,65.553
GND on Top Layer "GND_L01_P014" (solid, remove dead copper, pour order 14): 17.25,6.2 17.225,6.225 16.5,6.225 16.5,6.875 16.3,7.075 15.6,7.075 15.25,7.425 12.7,7.425 12.45,7.175 12.45,6.675 11.975,6.675 11.7,6.4 11.7,5.075 11.675,5.075 10.7,4.1 10.7,2.675 10.125,2.1 8.95,2.1 8.95,2.125 8.825,2.25 8.825,12.2 8.375,12.65 3.75,12.65 3.75,-0.075 4.95,-1.275 26.475,-1.275 26.475,10.975 26.35,11.1 20.925,11.1 20.925,10.95 20.15,10.175 20.15,1.725 19.925,1.5 17.75,1.5 17.75,2.05 17.4,2.4 17.4,3.15 16.95,3.15 16.725,3.375 16.725,4.7 17.225,5.2
AGND on GND/PWR1 "AGND_L02_P021" (solid, remove dead copper, pour order 21): 2,-2.5 27,-2.5 27,66 2,66
GND on GND/PWR1 "GND_L02_P015" (solid, remove dead copper, pour order 15): 17.25,6.2 17.225,6.225 16.5,6.225 16.5,6.875 16.3,7.075 15.6,7.075 15.25,7.425 12.7,7.425 12.45,7.175 12.45,6.675 11.975,6.675 11.7,6.4 11.7,5.075 11.675,5.075 10.7,4.1 10.7,2.675 10.125,2.1 8.95,2.1 8.95,2.125 8.825,2.25 8.825,12.2 8.375,12.65 3.75,12.65 3.75,-0.075 4.95,-1.275 26.475,-1.275 26.475,10.975 26.35,11.1 20.925,11.1 20.925,10.95 20.15,10.175 20.15,1.725 19.925,1.5 17.75,1.5 17.75,2.05 17.4,2.4 17.4,3.15 16.95,3.15 16.725,3.375 16.725,4.7 17.225,5.2
AGND on SIG2 "AGND_L04_P023" (solid, remove dead copper, pour order 23): 0,-2.5 27.5,-2.5 27.5,63.75 0,63.75
GND on SIG2 "GND_L04_P018" (solid, remove dead copper, pour order 18): 17.25,6.2 17.225,6.225 16.5,6.225 16.5,6.875 16.3,7.075 15.6,7.075 15.25,7.425 12.7,7.425 12.45,7.175 12.45,6.675 11.975,6.675 11.7,6.4 11.7,5.075 11.675,5.075 10.7,4.1 10.7,2.675 10.125,2.1 8.95,2.1 8.95,2.125 8.825,2.25 8.825,12.2 8.375,12.65 3.75,12.65 3.75,-0.075 4.95,-1.275 26.475,-1.275 26.475,10.975 26.35,11.1 20.925,11.1 20.925,10.95 20.15,10.175 20.15,1.725 19.925,1.5 17.75,1.5 17.75,2.05 17.4,2.4 17.4,3.15 16.95,3.15 16.725,3.375 16.725,4.7 17.225,5.2
AGND on GND/PWR2 "AGND_L05_P024" (solid, remove dead copper, pour order 24): 0,-2.5 27.5,-2.5 27.5,63.75 0,63.75
GND on GND/PWR2 "GND_L05_P019" (solid, remove dead copper, pour order 19): 17.25,6.2 17.225,6.225 16.5,6.225 16.5,6.875 16.3,7.075 15.6,7.075 15.25,7.425 12.7,7.425 12.45,7.175 12.45,6.675 11.975,6.675 11.7,6.4 11.7,5.075 11.675,5.075 10.7,4.1 10.7,2.675 10.125,2.1 8.95,2.1 8.95,2.125 8.825,2.25 8.825,12.2 8.375,12.65 3.75,12.65 3.75,-0.075 4.95,-1.275 26.475,-1.275 26.475,10.975 26.35,11.1 20.925,11.1 20.925,10.95 20.15,10.175 20.15,1.725 19.925,1.5 17.75,1.5 17.75,2.05 17.4,2.4 17.4,3.15 16.95,3.15 16.725,3.375 16.725,4.7 17.225,5.2
AGND on Bottom Layer "AGND_L06_P025" (solid, remove dead copper, pour order 25): 0,-2.5 25.825,-2.5 25.825,63.75 0,63.75
GND on Bottom Layer "GND_L06_P020" (solid, remove dead copper, pour order 20): 17.25,6.2 17.225,6.225 16.5,6.225 16.5,6.875 16.3,7.075 15.6,7.075 15.25,7.425 12.7,7.425 12.45,7.175 12.45,6.675 11.975,6.675 11.7,6.4 11.7,5.075 11.675,5.075 10.7,4.1 10.7,2.675 10.125,2.1 8.95,2.1 8.95,2.125 8.825,2.25 8.825,12.2 8.375,12.65 3.75,12.65 3.75,-0.075 4.95,-1.275 26.475,-1.275 26.475,10.975 26.35,11.1 20.925,11.1 20.925,10.95 20.15,10.175 20.15,1.725 19.925,1.5 17.75,1.5 17.75,2.05 17.4,2.4 17.4,3.15 16.95,3.15 16.725,3.375 16.725,4.7 17.225,5.2

## Silkscreen, mask and mechanical layers (free items; w line width, h text height)
Top Overlay:
Board Layer Stack Bottom Overlay:
  drawing of 10 lines, arcs and shapes, not listed
  text "S.Frey, / Lakshmigan.S" at 4.65,12.799 h1 r270
  text "BioGAP" at 22.809,0.316 h1.52
  text "EMG shield" at 15.552,0.242 h1.52
Mechanical 1:
  text ".Pcb_File_Name_No_Path" at 0,-2.5 h1.52